# Altium PCB BUCKCONVERTER-V1L1.PcbDoc (part 2 of 3)
Units mm, origin at the board's own origin, x right, y up, seen from the top; angles counter-clockwise.
Board outline 95.98 x 51.66 mm, 2 copper layers (Top Layer, Bottom Layer); 114 components, 64 nets, 347 pads, 125 vias.
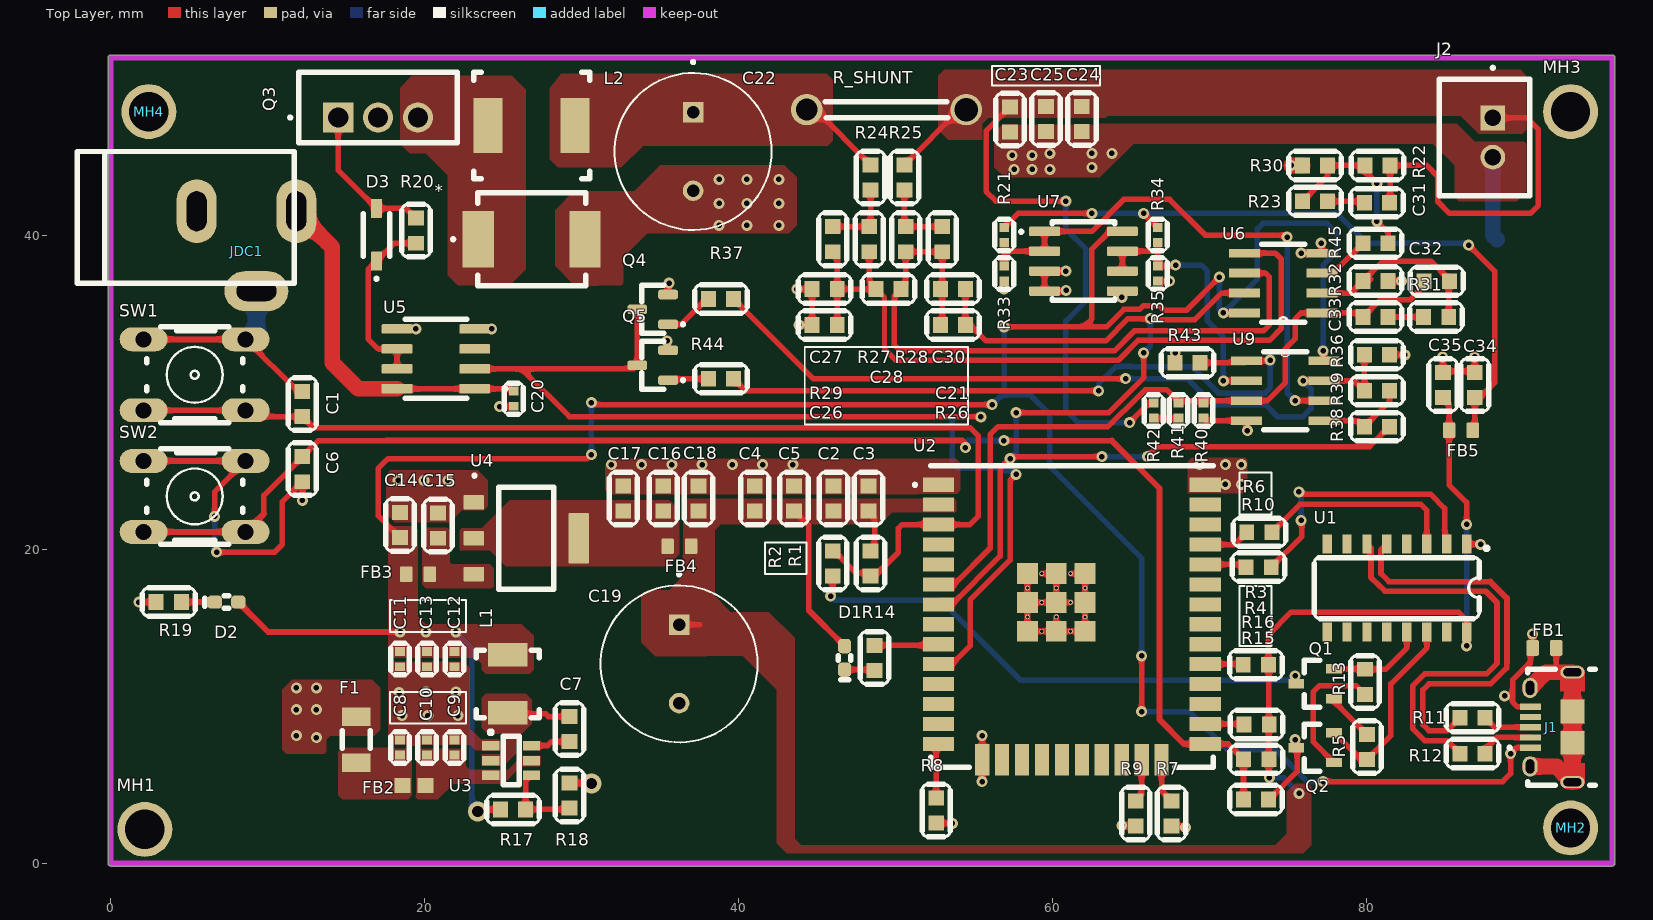
[diagram p0: Top Layer view]

## Part data (continued)
R1 R2 R3 R4 R5 R6 R7 R8 R9 R10 R11 R12 R13 R14 R15 R16 R19: library part "Resistor 2.2K", "Res Thick Film 0603 2.2K Ohm 5% 1/10W ±200ppm/°C Molded SMD SMD Paper T/R", Case Code (Imperial)=0603, Case Code (Metric)=1608, Manufacturer=Vishay, Manufacturer Part Number=CRCW06032K20JNEA, Max Operating Temperature=155°C, Max Power Dissipation=100mW, Min Operating Temperature=-55°C, Package Quantity=5000, Ratings=AEC-Q200, Resistance=2.2kR, Resistance Tolerance=5%, Resistor Type="Thick Film", Temperature Coefficient=200ppm/°C, Voltage Rating=75V, Case/Package=0603, Category="Chip SMD Resistors", ComponentLink1Description=https://datasheet.ciiva.com/2462/dcrcwe3-2462048.pdf?src-supplier=Digikey, ComponentLink1URL=https://datasheet.ciiva.com/2462/dcrcwe3-2462048.pdf?src-supplier=Digikey, ComponentLink2Description=https://datasheet.ciiva.com/16767/70201119-16767464.pdf?src-supplier=Allied+Electronics, ComponentLink2URL=https://datasheet.ciiva.com/16767/70201119-16767464.pdf?src-supplier=Allied+Electronics, ComponentLink3Description=https://datasheet.ciiva.com/2462/dcrcwe3-2462046.pdf?src-supplier=Digikey, ComponentLink3URL=https://datasheet.ciiva.com/2462/dcrcwe3-2462046.pdf?src-supplier=Digikey, ComponentLink4Description=https://datasheet.ciiva.com/5541/dcrcwe3-109170-5541959.pdf?src-supplier=Mouser, ComponentLink4URL=https://datasheet.ciiva.com/5541/dcrcwe3-109170-5541959.pdf?src-supplier=Mouser, ComponentLink5Description=https://datasheet.ciiva.com/16286/dcrcwe3-16286997.pdf?src-supplier=Future+Electronics, ComponentLink5URL=https://datasheet.ciiva.com/16286/dcrcwe3-16286997.pdf?src-supplier=Future+Electronics, Construction=Rectangular, Contact Plating=Tin, Depth=0.85mm, Features="Automotive AEC-Q200", Height=0.45mm, Lead Free=5697LeadFree, Length=1.55mm, Military Standard=Not, Number of Terminations=2, Packaging="Tape and Reel", Power Rating=100mW, Pricing 1="5000=0.0053 (USD)", Radiation Hardening=No, Reach SVHC Compliant=Unknown, RoHS=Yes, RoHS Compliant=Yes, Series=CRCW, Size Code=0603, Stock 1=130000, Supplier 1="Arrow Electronics", Supplier Part Number 1=CRCW06032K20JNEA, Termination=SMD/SMT, Tolerance=5%, Weight=7.1E-05oz, Width=0.85mm
R17 R18 R22 R23 R24 R25 R26 R27 R28 R29 R30 R31 R32 R36 R37 R38 R39 R43 R44 R45: library part "RESCHP0195 2K7 1% 0603 SMD", "RES CHP 2K7 1% 1/10W 0603 SMD", CERTIFICATION=NA, CLASS=B, ComponentLink1Description=Datasheet, ComponentLink1URL=https://datasheet.lcsc.com/lcsc/2304140030_YAGEO-RC0603FR-072K7L_C114612.pdf, LINE=SMT, MOUNT=SMD, TMG CODE=None, TMG PN=RESCHP0195, TYPE=EP, UNIT=PCS
R20: library part "Resistor 0R", "Res Thick Film 0603 0 Ohm Pad SMD T/R", Case Code (Imperial)=0603, Case Code (Metric)=1608, Manufacturer=Vishay, Manufacturer Part Number=CRCW06030000Z0EBC, Max Operating Temperature=155°C, Max Power Dissipation=100mW, Min Operating Temperature=-55°C, Voltage Rating=75V, Case/Package=0603, Category="Chip SMD Resistors", ComponentLink1Description=http://www.vishay.com/docs/28773/crcwce3.pdf?src-supplier=Digikey, ComponentLink1URL=http://www.vishay.com/docs/28773/crcwce3.pdf?src-supplier=Digikey, Height=550um, Lead Free=5697LeadFree, Number of Terminations=2, Packaging="Cut Tape", Power Rating=100mW, Pricing 1="1=0.005 (USD)", Resistance=0R, RoHS=Yes, RoHS Compliant=Yes, Series=CRCW-C, Stock 1=4, Supplier 1="Arrow Electronics", Supplier Part Number 1=CRCW06030000Z0EBC
R21 R33 R34 R35 R40 R41 R42: library part "RESCHP0085 33K 1% 0402 SMD", "RES CHP 33K 1% 1/16W 0402 SMD", CERTIFICATION=NA, CLASS=B, ComponentLink1Description=Datasheet, ComponentLink1URL=https://datasheet.lcsc.com/lcsc/2304140030_YAGEO-AC0402FR-0775KL_C144737.pdf, LINE=SMT, MOUNT=SMD, TMG CODE=None, TYPE=EP, UNIT=PCS
R_SHUNT: library part R_SHUNT
SW1 SW2: "Switch button 4 pin"
U2: "Multiprotocol Modules SMD module ESP32-WROOM-32UE, ESP32-D0WD-V3, ESP32 ECO V3,", Manufacturer="Espressif Systems", Supplier Part Number 1=1965-ESP32-WROOM-32UE-N8CT-ND, Category=LDO, ComponentLink1Description=https://datasheet.octopart.com/ESP32-WROOM-32UE-N8-Espressif-Systems-datasheet-188867343.pdf?src-supplier=TME, ComponentLink1URL=https://datasheet.octopart.com/ESP32-WROOM-32UE-N8-Espressif-Systems-datasheet-188867343.pdf?src-supplier=TME, Manufacturer Part Number=ESP32-WROOM-32UE-N8, Pricing 1="1=5,28, 10=4,566, 25=4,3196, 100=3,9802, 250=3,7768 (USD)", RoHS=No, Stock 1=3266, Supplier 1=Digikey
U3: library part "ICSOCV0021 BCK TPS563201 3A SOT23-6 SMD", "ICS OCV BCK TPS563201 3A SOT23-6 SMD", CERTIFICATION=NA, CLASS=B, ComponentLink1Description=Datasheet, ComponentLink1URL=https://datasheet.lcsc.com/lcsc/2304241919_Texas-Instruments-TPS563201DDCR_C116592.pdf, LINE=SMT, MOUNT=SMD, TMG CODE=None, TYPE=EP, UNIT=PCS
U4: "1A LOW DROPOUT VOLTAGE REGULATOR SOT-223", Package="SOT-223 Seeed Technology", Availability="Not in stock", Check_prices=https://www.snapeda.com/parts/AMS1117/Advanced+Monolithic+Systems/view-part/?ref=eda, MF="Advanced Monolithic Systems", MP=AMS1117, Price=None, SnapEDA_Link=https://www.snapeda.com/parts/AMS1117/Advanced+Monolithic+Systems/view-part/?ref=snap
U5: "Microchip TC4420EOA,MOSFET Power Driver 6A,4.5 to 18V,Non-Inverting,8-Pin SOIC", Package="SOIC-8 Microchip", Check_prices=https://www.snapeda.com/parts/TC4420EOA/Microchip/view-part/?ref=eda, MF=Microchip, MP=TC4420EOA, SnapEDA_Link=https://www.snapeda.com/parts/TC4420EOA/Microchip/view-part/?ref=snap
U6: "IC OPAMP ZERO-DRIFT 2 CIRC 8SOIC Zero-Drift Amplifier 2 Circuit Rail-to-Rail 8-SOIC", Case/Package=R, Input Bias Current=30pA, Input Capacitance=10pF, Input Offset Voltage (Vos)=5µV, Manufacturer="Analog Devices", Manufacturer Lifecycle Status=PRODUCTION, Max Dual Supply Voltage=2.5V, Max Operating Temperature=125°C, Max Supply Current=2.2mA, Max Supply Voltage=5V, Min Dual Supply Voltage=1.35V, Min Operating Temperature=-40°C, Min Supply Voltage=2.7V, Operating Supply Voltage=3V, Output Current per Channel=30mA, Power Supply Rejection Ratio (PSRR)=130dB, Quiescent Current=1.1mA, Voltage Gain=145dB, -3db Bandwidth=2.5MHz, Bandwidth=2.5MHz, Category="Amplifiers - Op Amps, Buffer, Instrumentation", Common Mode Rejection Ratio=140dB, ComponentLink1Description=https://datasheet.octopart.com:443/AD8629ARZ-Analog-Devices-datasheet-42968418.pdf?src-supplier=Analog+Devices, ComponentLink1URL=https://datasheet.octopart.com:443/AD8629ARZ-Analog-Devices-datasheet-42968418.pdf?src-supplier=Analog+Devices, ComponentLink2Description=https://octopart.com:443/opatz8j6/c1?t=aWeMBPM-JELAnCcbC-n1WTTrasgumx2A8BiJtAhLoS8u_17NOkMzPt3gzRWoakvQXXH3NC3R8gFX4G48g061UaBXGwogGE1Uj-8sqvtrqgK1sY7jDh3eWAwH1CQwPW1Jv6IADWKJqAiwnXxASv0RMDRSm7LbjcggLYfRMDkPTzyCQChyI1msocHWpd5h7OrGjev3Iz3E-o2_l5cB9yrdImHcqb4LtoQO-WcXBt-1DHy8NwqhYNIhrkYjFsx4VNs9gn0Mq788wCztvxO1GP0L9zgs0I_y0NnBDPP4_fEzu3H-nfdZ63w&src-supplier=Analog+Devices, ComponentLink2URL=https://octopart.com:443/opatz8j6/c1?t=aWeMBPM-JELAnCcbC-n1WTTrasgumx2A8BiJtAhLoS8u_17NOkMzPt3gzRWoakvQXXH3NC3R8gFX4G48g061UaBXGwogGE1Uj-8sqvtrqgK1sY7jDh3eWAwH1CQwPW1Jv6IADWKJqAiwnXxASv0RMDRSm7LbjcggLYfRMDkPTzyCQChyI1msocHWpd5h7OrGjev3Iz3E-o2_l5cB9yrdImHcqb4LtoQO-WcXBt-1DHy8NwqhYNIhrkYjFsx4VNs9gn0Mq788wCztvxO1GP0L9zgs0I_y0NnBDPP4_fEzu3H-nfdZ63w&src-supplier=Analog+Devices, ComponentLink3Description=https://datasheet.octopart.com:443/AD8629ARZ-Analog-Devices-datasheet-10103768.pdf?src-supplier=Upverter, ComponentLink3URL=https://datasheet.octopart.com:443/AD8629ARZ-Analog-Devices-datasheet-10103768.pdf?src-supplier=Upverter, ComponentLink4Description=https://datasheet.octopart.com:443/AD8629ARZ-Analog-Devices-datasheet-5322301.pdf?src-supplier=Upverter, ComponentLink4URL=https://datasheet.octopart.com:443/AD8629ARZ-Analog-Devices-datasheet-5322301.pdf?src-supplier=Upverter, ComponentLink5Description=https://datasheet.octopart.com:443/AD8629ARZ-Analog-Devices-datasheet-23752859.pdf?src-supplier=Upverter, ComponentLink5URL=https://datasheet.octopart.com:443/AD8629ARZ-Analog-Devices-datasheet-23752859.pdf?src-supplier=Upverter, ComponentLink6Description=https://datasheet.octopart.com:443/AD8629ARZ-Analog-Devices-datasheet-8858042.pdf?src-supplier=Upverter, ComponentLink6URL=https://datasheet.octopart.com:443/AD8629ARZ-Analog-Devices-datasheet-8858042.pdf?src-supplier=Upverter, ComponentLink7Description=https://datasheet.octopart.com:443/AD8629ARZ-Analog-Devices-datasheet-32048149.pdf?src-supplier=element14+APAC, ComponentLink7URL=https://datasheet.octopart.com:443/AD8629ARZ-Analog-Devices-datasheet-32048149.pdf?src-supplier=element14+APAC, ComponentLink8Description=https://datasheet.octopart.com:443/AD8629ARZ-Analog-Devices-datasheet-101563144.pdf?src-supplier=element14+APAC, ComponentLink8URL=https://datasheet.octopart.com:443/AD8629ARZ-Analog-Devices-datasheet-101563144.pdf?src-supplier=element14+APAC, ComponentLink9Description=https://datasheet.octopart.com:443/AD8629ARZ-Analog-Devices-datasheet-9458.pdf?src-supplier=TME, ComponentLink9URL=https://datasheet.octopart.com:443/AD8629ARZ-Analog-Devices-datasheet-9458.pdf?src-supplier=TME, ComponentLink10Description=https://datasheet.octopart.com:443/AD8629ARZ-Analog-Devices-datasheet-14139723.pdf?src-supplier=iiiC, ComponentLink10URL=https://datasheet.octopart.com:443/AD8629ARZ-Analog-Devices-datasheet-14139723.pdf?src-supplier=iiiC, ComponentLink11Description=https://datasheet.octopart.com:443/AD8629ARZ-Analog-Devices-datasheet-9815337.pdf?src-supplier=RS+(Formerly+Allied+Electronics), ComponentLink11URL=https://datasheet.octopart.com:443/AD8629ARZ-Analog-Devices-datasheet-9815337.pdf?src-supplier=RS+(Formerly+Allied+Electronics), ComponentLink12Description=http://sigma.octopart.com:80/conflict_mineral_statement/Analog-Devices-company-33.pdf?src-supplier=Compliance+Statements, ComponentLink12URL=http://sigma.octopart.com:80/conflict_mineral_statement/Analog-Devices-company-33.pdf?src-supplier=Compliance+Statements, ComponentLink13Description=https://octopart.com:443/opatz8j6/c1?t=GuIiLQSqHR5UtH-ccvOgZ_rMPgdoDO9MBhNGz1lrC6uFtX1Ty2dLJJE3esEi3LdxH2WSZGSDEcND3r14vXW1YQGdY8YbjY8rd4j2rV3vc971hwplIN7mnrJEC29glHuaUEUKb6evx9vL8H9Okke6qfKuVvzeC_JtJbwHi1gEpzxsUdW9RNtRF7Nil8ktKupsHU6F-uGzSovI8YJeOX7T-MxaDqzLTa9fFFbbKuS3iXo0ronF4OJTx1UqYg6AqVsvYcdlTWC_iXVQ4-Dde1iCmj54rakYuCUCE_xobSzT3w-tBTMj6Ew&src-supplier=Compliance+Statements, ComponentLink13URL=https://octopart.com:443/opatz8j6/c1?t=GuIiLQSqHR5UtH-ccvOgZ_rMPgdoDO9MBhNGz1lrC6uFtX1Ty2dLJJE3esEi3LdxH2WSZGSDEcND3r14vXW1YQGdY8YbjY8rd4j2rV3vc971hwplIN7mnrJEC29glHuaUEUKb6evx9vL8H9Okke6qfKuVvzeC_JtJbwHi1gEpzxsUdW9RNtRF7Nil8ktKupsHU6F-uGzSovI8YJeOX7T-MxaDqzLTa9fFFbbKuS3iXo0ronF4OJTx1UqYg6AqVsvYcdlTWC_iXVQ4-Dde1iCmj54rakYuCUCE_xobSzT3w-tBTMj6Ew&src-supplier=Compliance+Statements, Contact Plating=Tin, Gain=120dB, Gain Bandwidth Product=2.5MHz, Height=1.5mm, Length=5mm, Lifecycle Status=Production, Manufacturer Part Number=AD8629ARZ, Number of Amplifiers=2, Number of Channels=2, Number of Circuits=2, Number of Elements=2, Number of Pins=8, Operating Supply Current=2.2mA, Pricing 1="1=6,808, 10=4,527, 25=3,207, 98=2,961, 294=2,8, 588=2,655 (USD)", Radiation Hardening=No, REACH SVHC=No, RoHS=Compliant, Schedule B=8542330000, Slew Rate=1V/µs, Stock 1=3408, Supplier 1="Arrow Electronics", Supplier Part Number 1=AD8629ARZ, Width=4mm
U7: "Operational Amplifier, 2-Channels, 1.1 MHz, 0.6 V/us, 3 V to 30 V, 8 Pins, SOIC", Manufacturer=STMicroelectronics, Category="Amplifiers - Op Amps, Buffer, Instrumentation", ComponentLink1Description=https://datasheet.ciiva.com/15129/getdatasheetpartid-39583-15129679.pdf?src-supplier=Verical, ComponentLink1URL=https://datasheet.ciiva.com/15129/getdatasheetpartid-39583-15129679.pdf?src-supplier=Verical, ComponentLink2Description=https://datasheet.ciiva.com/29306/155599-da-01-en-op-verst-lm358dt-stm-29306826.pdf?src-supplier=Conrad, ComponentLink2URL=https://datasheet.ciiva.com/29306/155599-da-01-en-op-verst-lm358dt-stm-29306826.pdf?src-supplier=Conrad, ComponentLink3Description=https://datasheet.ciiva.com/14544/70013561-14544747.pdf?src-supplier=Allied+Electronics, ComponentLink3URL=https://datasheet.ciiva.com/14544/70013561-14544747.pdf?src-supplier=Allied+Electronics, ComponentLink4Description=https://datasheet.ciiva.com/16371/cd00000464-16371207.pdf?src-supplier=Future+Electronics, ComponentLink4URL=https://datasheet.ciiva.com/16371/cd00000464-16371207.pdf?src-supplier=Future+Electronics, ComponentLink5Description=https://datasheet.ciiva.com/1795/cd00000464-1795490.pdf?src-supplier=Digikey, ComponentLink5URL=https://datasheet.ciiva.com/1795/cd00000464-1795490.pdf?src-supplier=Digikey, ComponentLink6Description=https://datasheet.ciiva.com/1795/cd00000464-1795491.pdf?src-supplier=Digikey, ComponentLink6URL=https://datasheet.ciiva.com/1795/cd00000464-1795491.pdf?src-supplier=Digikey, ComponentLink7Description=https://datasheet.ciiva.com/1795/cd00000464-1795492.pdf?src-supplier=Digikey, ComponentLink7URL=https://datasheet.ciiva.com/1795/cd00000464-1795492.pdf?src-supplier=Digikey, Lead Free=5697LeadFree, Manufacturer Part Number=LM358DT, Pricing 1="2500=0,0596, 10000=0,056, 20000=0,0553 (USD)", RoHS=Yes, Stock 1=6035000, Supplier 1="Arrow Electronics", Supplier Part Number 1=LM358DT
U9: "LM393 Series Dual 36 V 250 nA SMT Low Power Voltage Comparator - SOIC-8", Ambient Temperature Range High=70°C, Case/Package=SO, Dual Supply Voltage=9V, Input Bias Current=250nA, Input Offset Voltage (Vos)=9mV, Manufacturer=STMicroelectronics, Max Dual Supply Voltage=18V, Max Junction Temperature (Tj)=150°C, Max Power Dissipation=710mW, Max Supply Current=2.5mA, Max Supply Voltage=36V, Min Dual Supply Voltage=1V, Min Operating Temperature=0°C, Min Supply Voltage=2V, Natural Thermal Resistance=125°C/W, Nominal Supply Current=1mA, Operating Supply Voltage=5V, Output Current per Channel=18mA, Voltage Gain=106.02dB, Category=Comparators, China RoHS=Compliant, ComponentLink1Description=https://datasheet.octopart.com:443/LM393D-STMicroelectronics-datasheet-62333484.pdf?src-supplier=SHENGYU+ELECTRONICS, ComponentLink1URL=https://datasheet.octopart.com:443/LM393D-STMicroelectronics-datasheet-62333484.pdf?src-supplier=SHENGYU+ELECTRONICS, ComponentLink2Description=https://datasheet.octopart.com:443/LM393D-STMicroelectronics-datasheet-11803910.pdf?src-supplier=element14+APAC, ComponentLink2URL=https://datasheet.octopart.com:443/LM393D-STMicroelectronics-datasheet-11803910.pdf?src-supplier=element14+APAC, ComponentLink3Description=https://datasheet.octopart.com:443/LM393D-STMicroelectronics-datasheet-10410545.pdf?src-supplier=Future+Electronics, ComponentLink3URL=https://datasheet.octopart.com:443/LM393D-STMicroelectronics-datasheet-10410545.pdf?src-supplier=Future+Electronics, ComponentLink4Description=https://datasheet.octopart.com:443/LM393D-STMicroelectronics-datasheet-21220619.pdf?src-supplier=Future+Electronics, ComponentLink4URL=https://datasheet.octopart.com:443/LM393D-STMicroelectronics-datasheet-21220619.pdf?src-supplier=Future+Electronics, ComponentLink5Description=https://datasheet.octopart.com:443/LM393D-STMicroelectronics-datasheet-14897319.pdf?src-supplier=TME, ComponentLink5URL=https://datasheet.octopart.com:443/LM393D-STMicroelectronics-datasheet-14897319.pdf?src-supplier=TME, ComponentLink6Description=https://datasheet.octopart.com:443/LM393D-STMicroelectronics-datasheet-163154.pdf?src-supplier=element14, ComponentLink6URL=https://datasheet.octopart.com:443/LM393D-STMicroelectronics-datasheet-163154.pdf?src-supplier=element14, ComponentLink7Description=https://datasheet.octopart.com:443/LM393D-STMicroelectronics-datasheet-616567.pdf?src-supplier=element14, ComponentLink7URL=https://datasheet.octopart.com:443/LM393D-STMicroelectronics-datasheet-616567.pdf?src-supplier=element14, ComponentLink8Description=https://datasheet.octopart.com:443/LM393D-STMicroelectronics-datasheet-8451836.pdf?src-supplier=Farnell, ComponentLink8URL=https://datasheet.octopart.com:443/LM393D-STMicroelectronics-datasheet-8451836.pdf?src-supplier=Farnell, ComponentLink9Description=https://datasheet.octopart.com:443/LM393D-STMicroelectronics-datasheet-7654.pdf?src-supplier=Nu+Horizons, ComponentLink9URL=https://datasheet.octopart.com:443/LM393D-STMicroelectronics-datasheet-7654.pdf?src-supplier=Nu+Horizons, ComponentLink10Description=https://datasheet.octopart.com:443/LM393D-STMicroelectronics-datasheet-14143375.pdf?src-supplier=iiiC, ComponentLink10URL=https://datasheet.octopart.com:443/LM393D-STMicroelectronics-datasheet-14143375.pdf?src-supplier=iiiC, ComponentLink11Description=https://datasheet.octopart.com:443/LM393D-STMicroelectronics-datasheet-9797164.pdf?src-supplier=RS+(Formerly+Allied+Electronics), ComponentLink11URL=https://datasheet.octopart.com:443/LM393D-STMicroelectronics-datasheet-9797164.pdf?src-supplier=RS+(Formerly+Allied+Electronics), ComponentLink12Description=https://datasheet.octopart.com:443/LM393D-STMicroelectronics-datasheet-52703.pdf?src-supplier=RS+(Formerly+Allied+Electronics), ComponentLink12URL=https://datasheet.octopart.com:443/LM393D-STMicroelectronics-datasheet-52703.pdf?src-supplier=RS+(Formerly+Allied+Electronics), Height=1.75mm, Height - Seated (Max)=1.75mm, Lead Free="Lead Free", Length=4.9mm, Lifecycle Status=Production, Manufacturer Part Number=LM393D, Max Input Current=250nA, Max Operating Temperature=70°C, MOUNT="Surface Mount", Number of Channels=2, Number of Circuits=2, Number of Elements=2, Number of Pins=8, Number of Terminals=8, Output Type=TTL, Power Dissipation=710mW, Pricing 1="1=0,3302, 10=0,325, 25=0,324, 100=0,322, 250=0,32, 2000=0,319, 4000=0,238 (USD)", Propagation Delay=1.3µs, Quiescent Current=2.5mA, Radiation Hardening=No, REACH SVHC=Yes, Response Time=1.3µs, RoHS=Compliant, Schedule B="8542390000, 8542390000|8542390000, 8542390000|8542390000|8542390000, 8542390000|8542390000|8542390000|8542390000", Stock 1=279976, Supplier 1="Arrow Electronics", Supplier Part Number 1=LM393D, Terminal Pitch=1.27mm, Turn-On Delay Time=1.3µs, TYPE="General Purpose", Weight=4.535924g, Width=3.9mm

## Free pads (board coordinates)
  round 0.7 hole 0.35: 13(18.415,14.732) 14(20.066,14.732) 15(21.971,14.732)

## Via types
v1: diameter 0.7, hole 0.35, Top Layer to Bottom Layer, tented both sides, 123 vias
v2: diameter 1.27, hole 0.711, Top Layer to Bottom Layer, tented both sides, 2 vias

## Nets (pads, with @x,y where several pads share a name; then routed paths per layer and width w, separated by ;. In a path a pad name is that pad's centre, name@x,y a point inside that pad or via, vN(x,y) a via of type N, cw(c..) or ccw(c..) an arc to the next point about the centre after c; other vN are vias at no path point)
3V3: C16.2 C17.2 FB4.1 U4.2 U4.4
5V: C11.2 C12.2 C13.2 C14.2 D2.1 FB3.1 J1.1 L1.2 pad.13 pad.14 pad.15 R17.2 U6.8 U7.8 U9.8 | length 177.7
  Top Layer w0.35: C14.2@18.415,20.752 17.018,22.149 17.018,25.146 17.653,25.781 30.353,25.781 v1(30.607,26.035) ; v2(23.368,3.302) 23.495,3.429 R17.2@24.816,3.429 ; v1(30.607,29.337) 30.734,29.21 v1(56.134,29.21) ; v1(56.896,34.163) 61.976,34.163 ; U7.8@64.424,40.257 63.625,40.257 62.484,39.116 62.484,34.671 61.976,34.163 ; v1(65.659,9.652) v1(65.659,13.208) ; v1(70.612,37.338) 68.502,35.228 67.092,35.228 66.802,35.518 65.767,35.518 65.525,35.275 64.52,35.275 63.408,34.163 61.976,34.163 ; v1(70.866,35.052) U6.8@72.212,35.052 ; v1(77.216,5.207) 88.646,5.207 89.154,5.715 v1(89.154,6.985) 89.535,7.366 J1.1@90.424,7.366 ; v1(77.216,32.639) 77.267,32.588 U9.8@77.267,32.004
  Top Layer w0.381: D2.1@8.116,16.637 10.021,14.732 pad.13@18.415,14.732
  Bottom Layer w0.35: pad.15@21.971,14.732 22.987,13.716 22.987,3.683 v2(23.368,3.302) ; v1(30.607,26.035) v1(30.607,29.337) ; v1(56.134,29.21) 56.769,29.845 ; v1(56.896,34.163) 56.896,29.972 56.769,29.845 ; v1(65.659,9.652) 68.707,9.652 71.12,7.239 74.168,7.239 76.2,5.207 v1(77.216,5.207) ; v1(65.659,13.208) 65.659,19.431 59.817,25.273 59.817,28.575 58.547,29.845 56.769,29.845 ; v1(70.612,37.338) 70.612,35.306 v1(70.866,35.052) 73.025,37.211 73.025,40.409 73.383,40.767 77.47,40.767 78.105,40.132 78.105,38.989 77.216,38.1 v1(77.216,32.639)